# EAGLE board shield_scaffold (EAGLE 6.3)
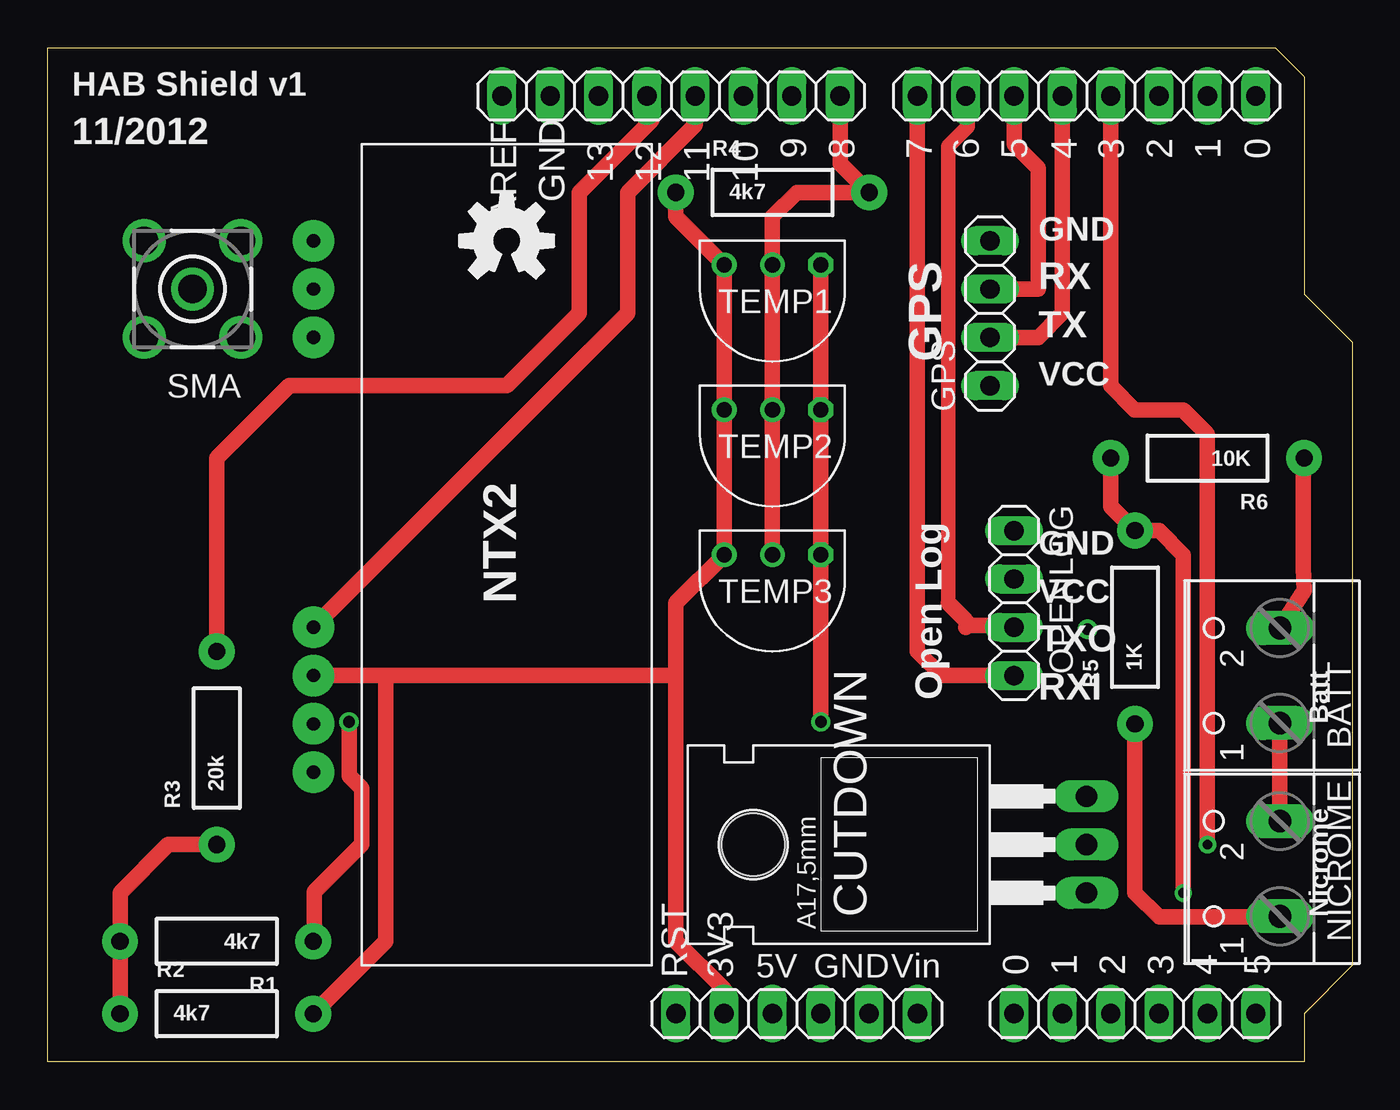
[diagram p0: board, top side]
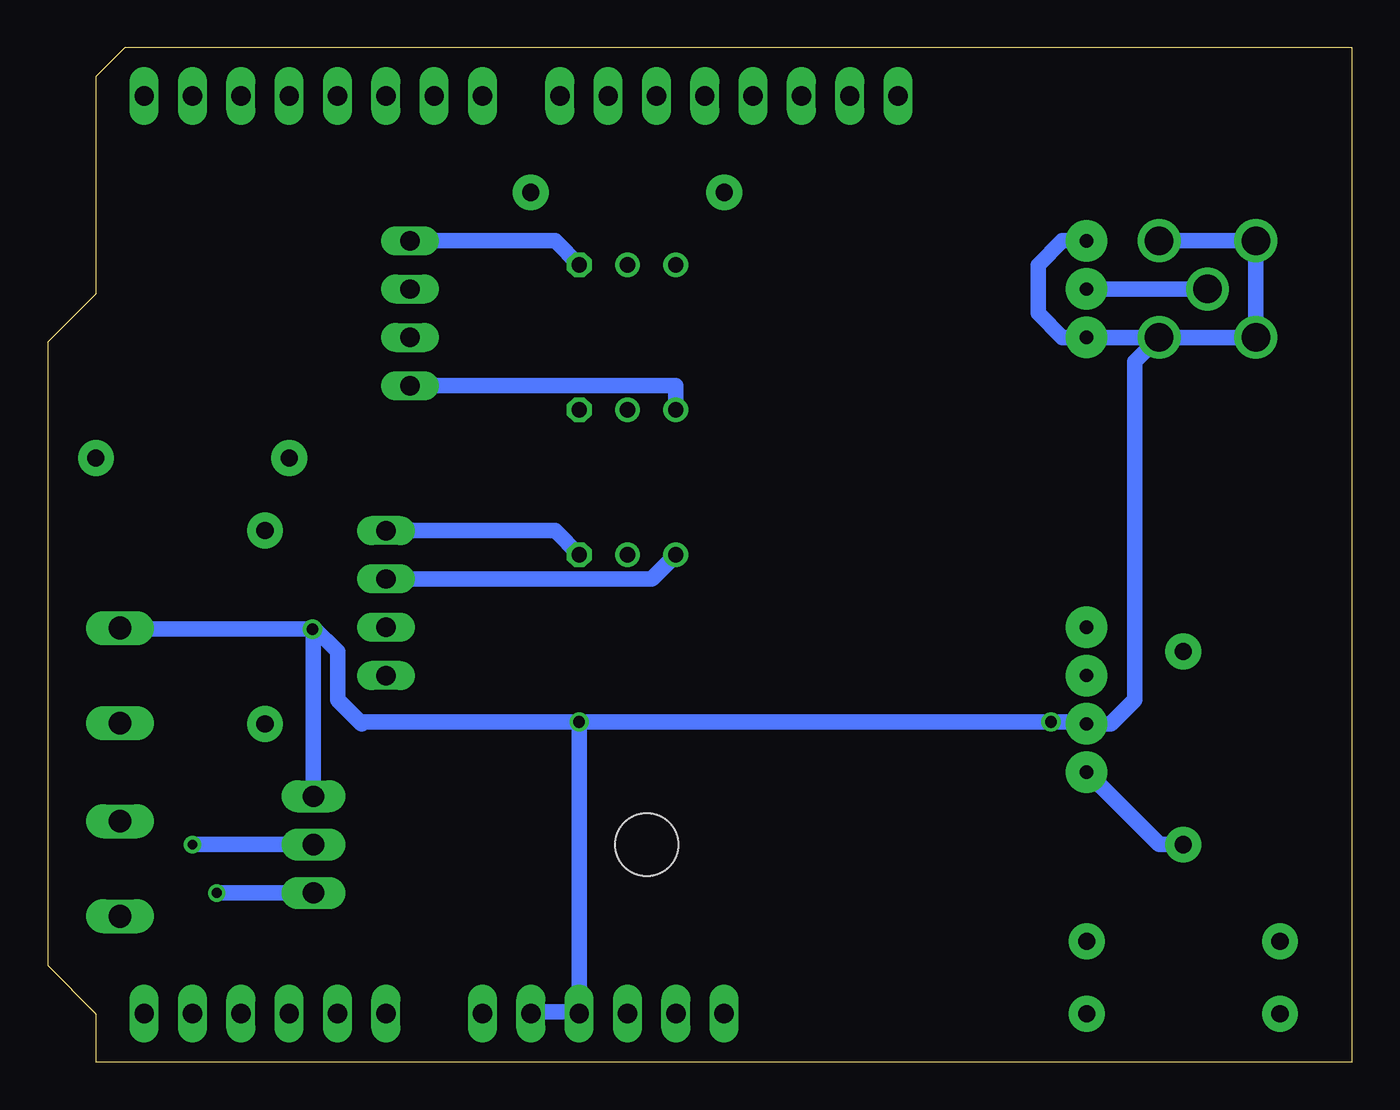
[diagram p1: board, bottom side, seen from below]

Size 68.58 x 53.34 mm. Coordinates in mm from the lower left corner, seen from the top.
Outline: 0,53.34 64.52,53.34 66.04,51.82 66.04,40.39 68.58,37.85 68.58,5.08 66.04,2.54 66.04,0 0,0 0,53.34
Copper layers (1*16): Top 0.035mm / dielectric 1.5mm / Bottom 0.035mm
Design rules "default *": minimum track width 30mil, minimum drill 24mil, track to track 8mil, track to pad 8mil, pad to pad 8mil, via to via 8mil, smd to smd 8mil, copper to edge 40mil, drill to drill 8mil, minimum pad ring 10mil, minimum via ring 8mil, stop-mask expansion 4mil, vias tented up to drill 0mil, thermal gap 10mil

## Footprints (pad centres in the part's own frame; a part is rotated, then mirrored left to right if it is on the bottom)
W237-102 = drill 1.194 long: 1 -2.5,-1.27; 2 2.5,-1.27
TO220 = drill 1.118 long: 1 -2.54,-6.35; 2 0,-6.35; 3 2.54,-6.35 | hole 3.302: 0,11.176
1X04 = drill 1.016 long: 1 -3.81,0; 2 -1.27,0; 3 1.27,0; 4 3.81,0
AXIAL-0.4 = drill 0.9 pad 1.88: P$1 -5.08,0; P$2 5.08,0
LTI-SASF54GT = drill 1.5 pad 2.2: 1 0,0; 2 -2.54,2.54; 3 2.54,2.54; 4 2.54,-2.54; 5 -2.54,-2.54
DS1821 = drill 0.8 octagon: P$1 -2.54,0 | drill 0.8: P$2 0,0; P$3 2.54,0
1X06 = drill 1.016 long: 1 -6.35,0; 2 -3.81,0; 3 -1.27,0; 4 1.27,0; 5 3.81,0; 6 6.35,0
1X08 = drill 1.016 long: 1 -8.89,0; 2 -6.35,0; 3 -3.81,0; 4 -1.27,0; 5 1.27,0; 6 3.81,0; 7 6.35,0; 8 8.89,0
NTX2 = drill 0.7 pad 2.184: 0V -2.54,-10.16; EN -7.62,-10.16; RFGND -22.86,-10.16; RFGND2 -27.94,-10.16; RFOUT -25.4,-10.16; TXD 0,-10.16; VCC -5.08,-10.16

## Placement (x,y rotation side)
BATT  9V  [W237-102]  63.5,20.32 90 top
CUTDOWN  BUZ21  [TO220]  48.26,11.43 90 top
GPS  [1X04]  49.53,39.37 90 top
NICROME  Wire  [W237-102]  63.5,10.16 90 top
OPENLOG  [1X04]  50.8,24.13 270 top
R1  4k7  [AXIAL-0.4]  8.89,6.35 180 top
R2  4k7  [AXIAL-0.4]  8.89,2.54 0 top
R3  20k  [AXIAL-0.4]  8.89,16.51 90 top
R4  4k7  [AXIAL-0.4]  38.1,45.72 0 top
R5  1K  [AXIAL-0.4]  57.15,22.86 90 top
R6  10K  [AXIAL-0.4]  60.96,31.75 180 top
SMA  LTI-SASF54GT  [LTI-SASF54GT]  7.62,40.64 180 top
TEMP1  DS1821  [DS1821]  38.1,41.91 180 top
TEMP2  DS1821  [DS1821]  38.1,34.29 180 top
TEMP3  DS1821  [DS1821]  38.1,26.67 180 top
U$1  POWER  [1X06]  39.37,2.54 0 top
U$2  ANALOG  [1X06]  57.15,2.54 0 top
U$3  DIGITAL_0_7  [1X08]  54.61,50.8 0 top
U$4  DIGITAL_8_13  [1X08]  32.77,50.8 0 top
U$5  NTX2  [NTX2]  24.13,15.24 270 top
U$6  OSHW-LOGOM  [OSHW-LOGO-M]  24.13,43.18 0 top

## Library data of the parts
BATT NICROME = con-wago-500; MPN: 237-102; OC_FARNELL: unknown; OC_NEWARK: 70K9898
CUTDOWN = transistor-fet
GPS OPENLOG = pinhead
R1-R6 = SparkFun-Resistors
SMA = con-coax; OC_FARNELL: unknown; OC_NEWARK: unknown
TEMP1-TEMP3 = Icarus
U$1-U$4 = arduino
U$5 = Ava
U$6 = SparkFun-Aesthetics

## Nets
9V+: BATT.1 NICROME.2
CUT: CUTDOWN.2 U$3.5
CUTLOAD: NICROME.1 R5.P$1
GND: BATT.2 CUTDOWN.3 GPS.4 OPENLOG.1 R1.P$1 R6.P$1 SMA.3 SMA.4 SMA.5 TEMP1.P$1 TEMP2.P$1 TEMP3.P$1 U$1.4 U$1.5 U$5.0V
GPSRX: GPS.3 U$3.3
GPSTX: GPS.2 U$3.4
LOGI: OPENLOG.4 U$3.1
LOGO: OPENLOG.3 U$3.2
N$2: CUTDOWN.1 R5.P$2 R6.P$2
NTX2E: U$4.5 U$5.EN
NTX2IO: R3.P$2 U$4.4
RFGND: SMA.2 U$5.RFGND U$5.RFGND2
RFOUT: SMA.1 U$5.RFOUT
TEMP: R4.P$2 TEMP1.P$2 TEMP2.P$2 TEMP3.P$2 U$4.8
TXD: R1.P$2 R2.P$1 R3.P$1 U$5.TXD
VCC: GPS.1 OPENLOG.2 R2.P$2 R4.P$1 TEMP1.P$3 TEMP2.P$3 TEMP3.P$3 U$1.2 U$5.VCC

## Tracks (layer width: path | path; a pad name or v marks a point on that pad's centre or on a via)
9V+
  Top 0.813: NICROME.2 BATT.1
CUT  (via drill 0.51)
  Top 0.813: U$3.5 55.88,35.56 57.15,34.29 59.69,34.29 60.96,33.02 v60.96,11.43
  Bottom 0.813: CUTDOWN.2 v60.96,11.43
CUTLOAD
  Top 0.813: R5.P$1 57.15,8.89 58.42,7.62 64.73,7.62 NICROME.1
GND  (via drill 0.61)
  Top 0.762: R6.P$1 66.04,31.9 65.99,31.7
  Top 0.813: BATT.2 66.04,24.79 65.99,26.01 65.99,31.7 | v40.64,17.88 TEMP3.P$1 TEMP2.P$1 TEMP1.P$1 | v15.85,17.88 15.85,15.04 16.51,14.38 16.51,11.43 14.02,8.94 14.02,6.4 R1.P$1
  Bottom 0.254: 54.61,22.81 54.61,22.86
  Bottom 0.762: 40.64,2.64 U$1.4 | 43.08,2.64 43.28,2.64 U$1.5
  Bottom 0.813: 43.08,2.64 40.64,2.64 v40.64,17.88 | v40.64,17.88 v15.85,17.88 14.02,17.88 U$5.0V 12.7,17.78 11.43,19.05 11.43,36.83 10.16,38.1 SMA.3 SMA.4 SMA.5 | v54.66,22.76 54.61,22.81 | 54.61,22.86 53.34,21.59 53.34,19.05 52.07,17.78 51.97,17.88 v40.64,17.88 | v54.66,22.76 54.61,22.71 CUTDOWN.3 | v54.66,22.76 64.71,22.76 BATT.2 | GPS.4 41.91,43.18 TEMP1.P$1 | OPENLOG.1 41.91,27.94 TEMP3.P$1
GPSRX
  Top 0.813: GPS.3 52.07,40.64 52.07,46.99 50.8,48.26 U$3.3
GPSTX
  Top 0.813: GPS.2 52.07,38.1 53.34,39.37 U$3.4
LOGI
  Top 0.813: OPENLOG.4 46.99,20.32 45.72,21.59 U$3.1
LOGO
  Top 0.762: 47.35,24.13 47.35,48.16 48.36,49.17 48.36,50.8 U$3.2 | 48.56,22.96 48.26,23.22
  Top 0.813: OPENLOG.3 50.7,22.96 48.56,22.96 48.36,22.96 48.26,22.86 | 48.26,23.22 47.35,24.13
  Bottom 0.762: 50.8,22.96 OPENLOG.3
N$2  (via drill 0.51)
  Top 0.813: v59.69,8.89 59.69,26.67 58.42,27.94 R5.P$2 55.88,29.21 R6.P$2
  Bottom 0.813: CUTDOWN.1 v59.69,8.89
NTX2E
  Top 0.813: U$5.EN 30.48,39.37 30.48,45.72 34.04,49.28 U$4.5
NTX2IO
  Top 0.813: R3.P$2 8.89,31.75 12.7,35.56 24.13,35.56 27.94,39.37 27.94,45.72 31.75,49.53 31.75,50.55 U$4.4
RFGND
  Bottom 0.813: SMA.2 U$5.RFGND 15.24,38.1 16.51,39.37 16.51,41.91 15.24,43.18 U$5.RFGND2
RFOUT
  Bottom 0.813: SMA.1 U$5.RFOUT
TEMP
  Top 0.813: U$4.8 41.66,47.24 R4.P$2 39.37,45.72 38.1,44.45 TEMP1.P$2 TEMP2.P$2 TEMP3.P$2
TXD
  Top 0.813: R2.P$1 R1.P$2 3.81,8.89 6.35,11.43 R3.P$1
  Bottom 0.813: R3.P$1 10.16,11.43 U$5.TXD
VCC
  Top 0.813: 33.02,20.32 33.02,24.13 TEMP3.P$3 TEMP2.P$3 TEMP1.P$3 33.02,44.45 R4.P$1 | 33.02,20.32 33.02,6.35 35.56,3.81 U$1.2 | U$5.VCC 17.78,20.32 | 17.78,20.32 33.02,20.32 | R2.P$2 17.78,6.35 17.78,20.32
  Bottom 0.813: GPS.1 35.56,35.56 TEMP2.P$3 | OPENLOG.2 36.83,25.4 TEMP3.P$3

## Text on the board
tPlace: HAB Shield v1 | 11/2012 | GND | RX | TX | GPS | VCC | NTX2 | GND | VCC | TXO | Open Log | RXI | Batt | Nicrome
tNames: 9 | 8 | 7 | 6 | 5 | 4 | 3 | 2 | 1 | 0 | 13 | 12 | 11 | 10 | GND | AREF | 0 | 1 | 2 | 3 | 4 | 5 | RST | 3V3 | 5V | GND | Vin
TallParts: USB | ISP | PWR
ArduinoHoles: 3.2mm | 2.2mm | 3.2mm